# Altium PCB charge_controller_pcb.PcbDoc
Units mil, origin at the board's own origin, x right, y up, seen from the top; angles counter-clockwise.
Board outline 2000 x 2000 mil, 2 copper layers (Top Layer, Bottom Layer); 22 components, 14 nets, 55 pads, 4 vias.
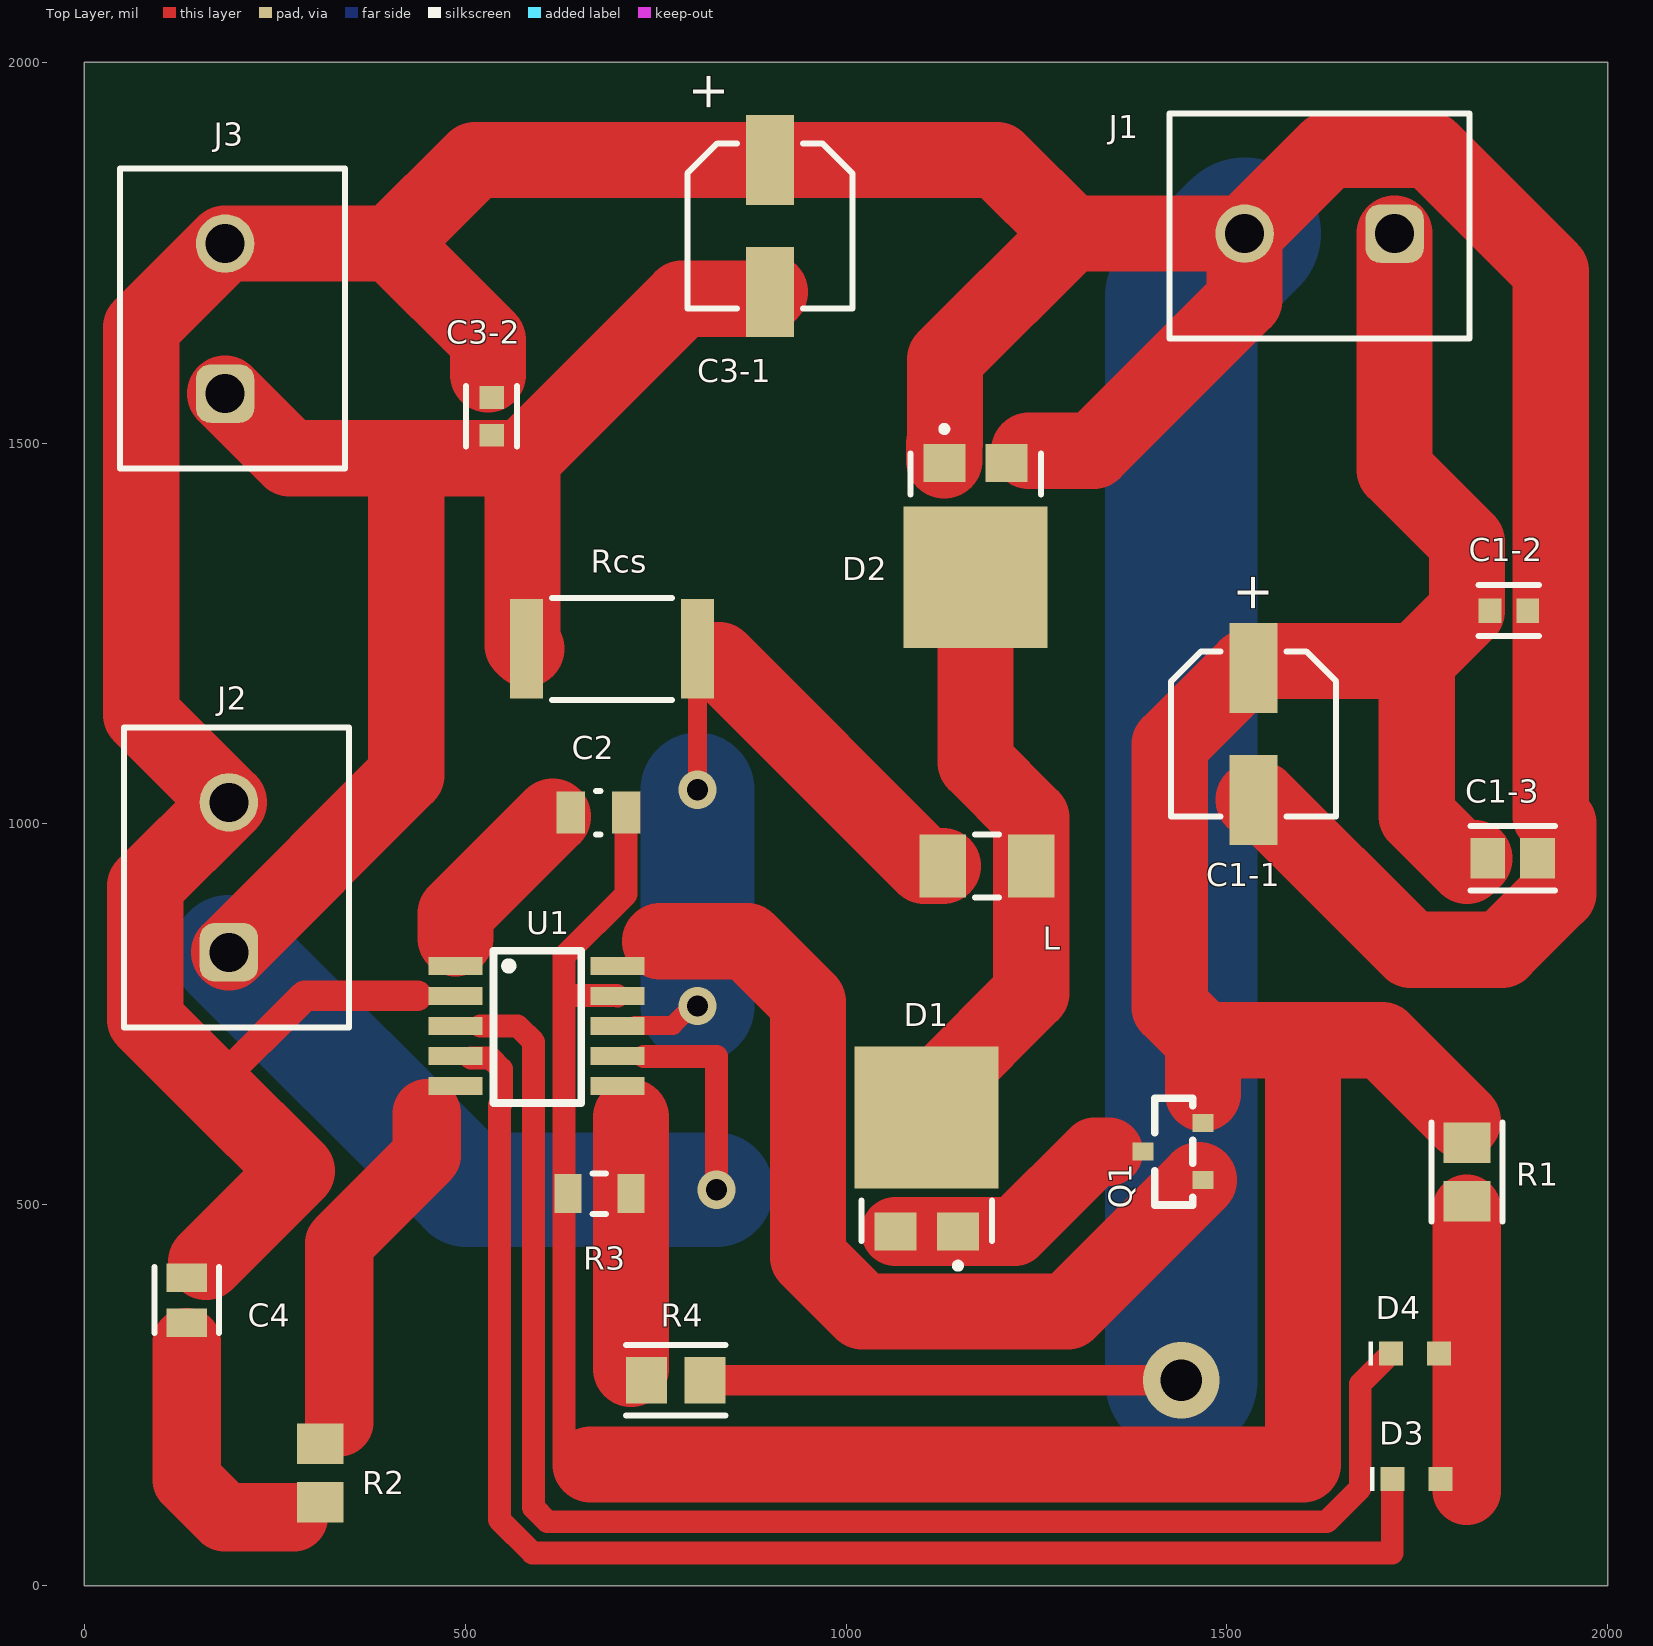
[diagram p0: Top Layer view]
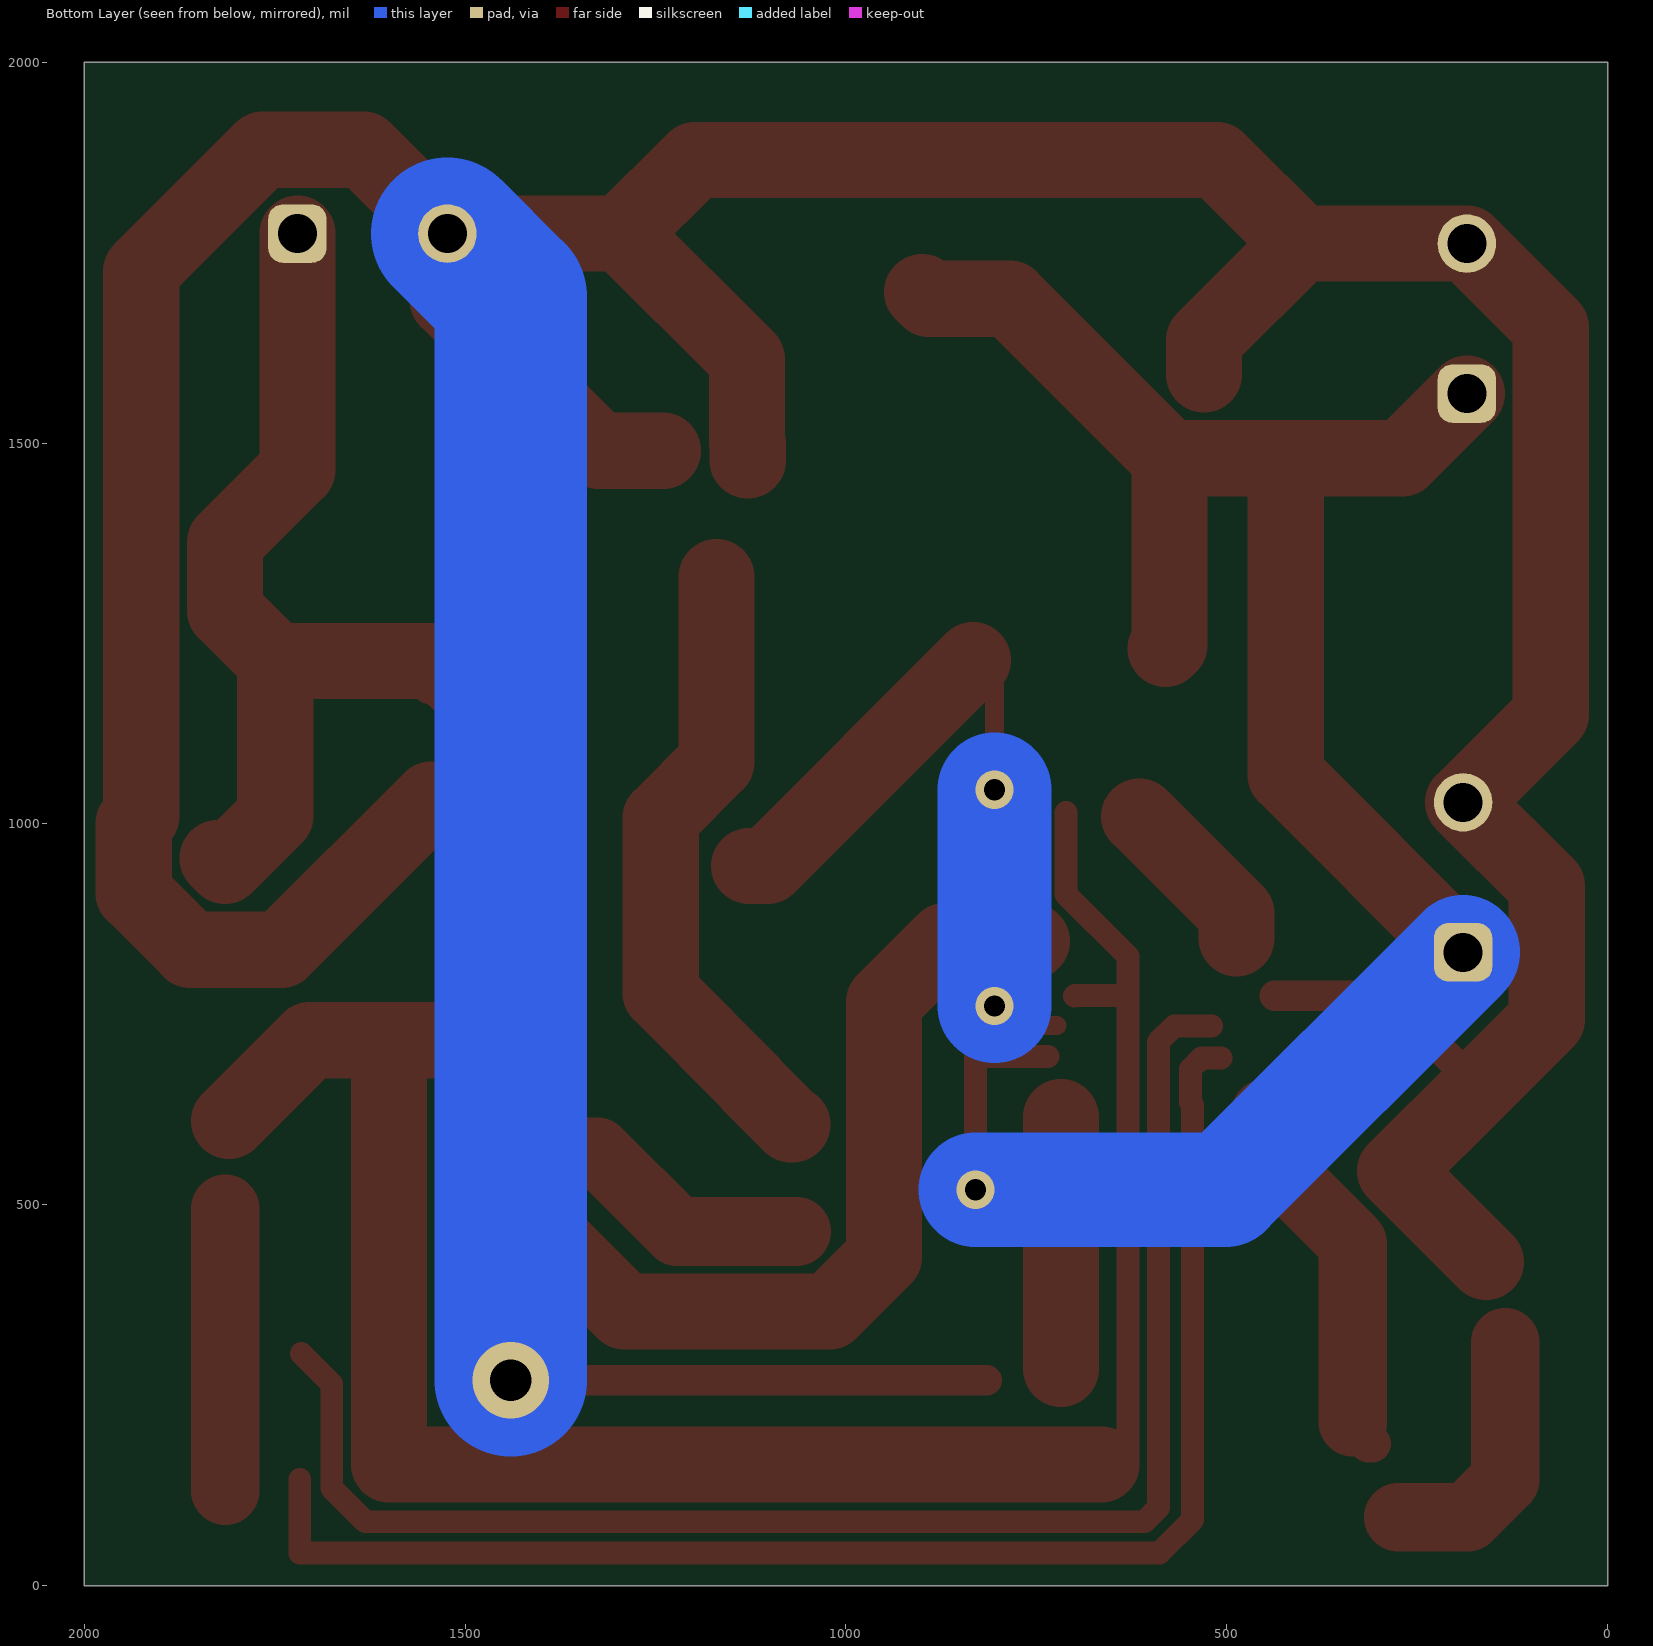
[diagram p1: Bottom Layer view, seen from below]
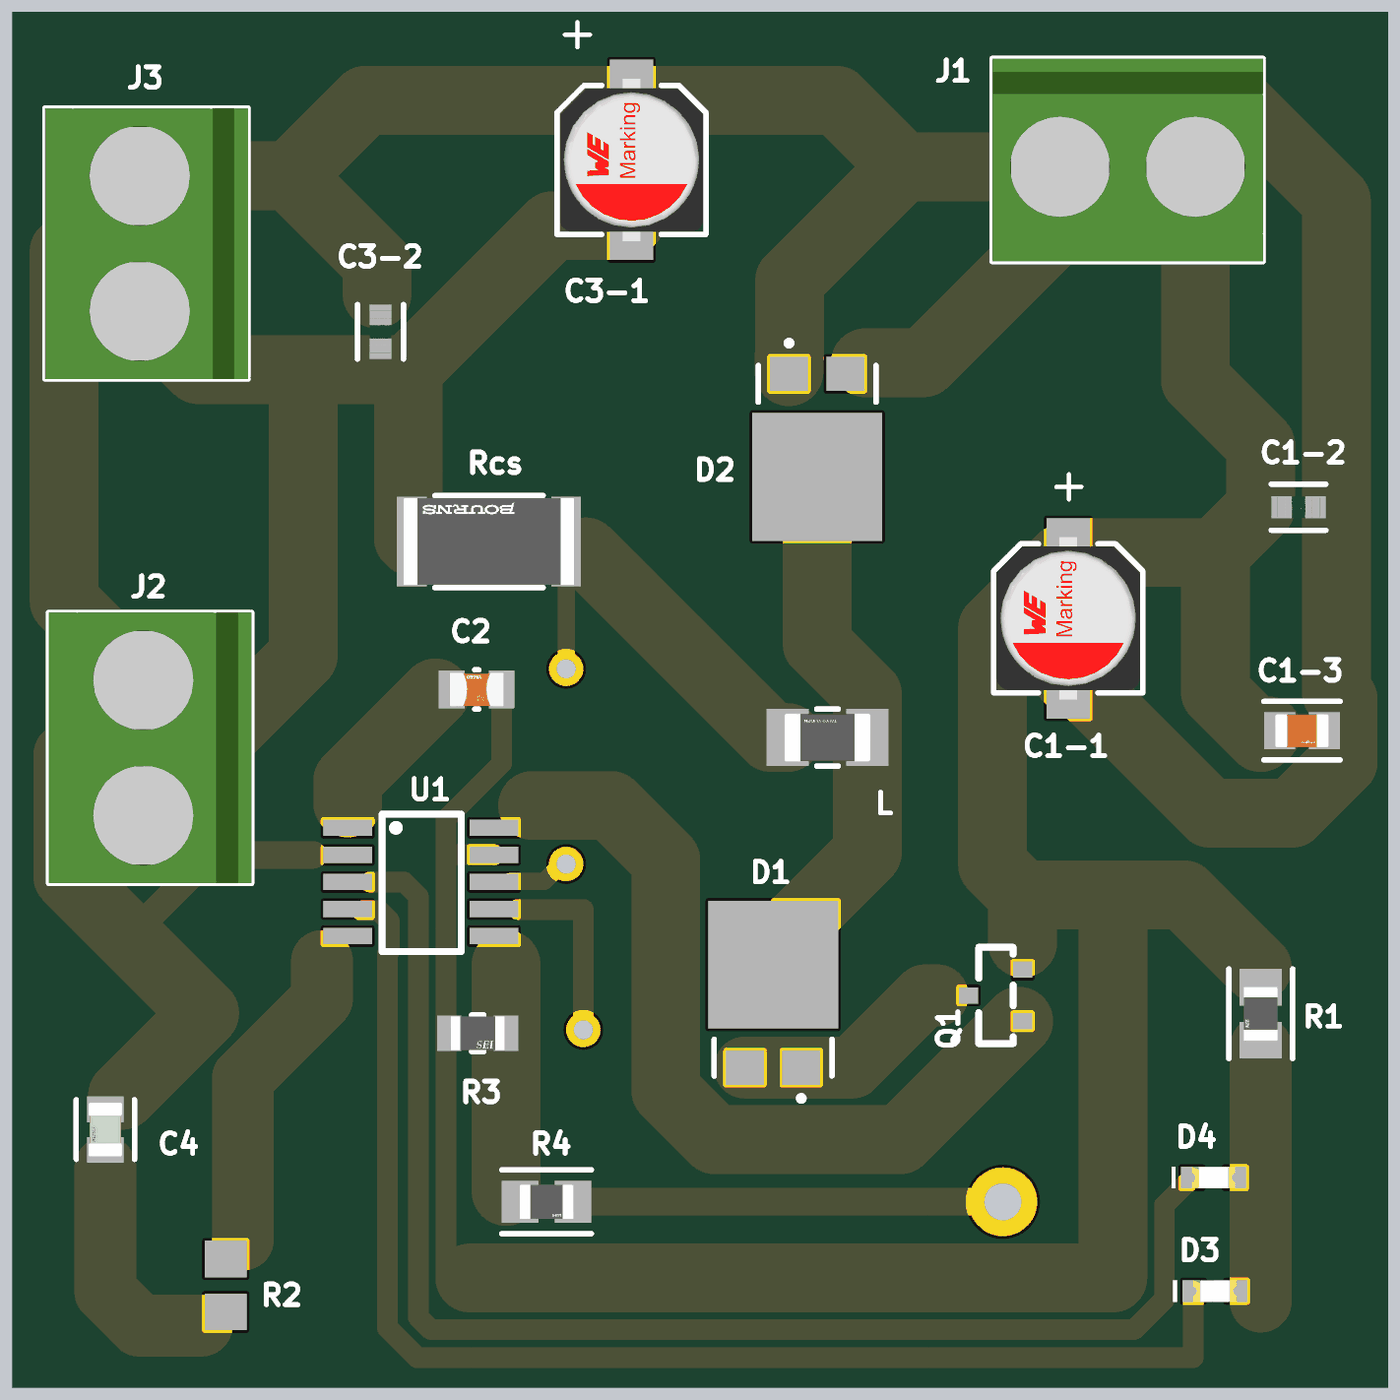
[diagram p2: 3D render of the assembled board from above, using the file's embedded part models]

## Layer stack, top to bottom
Top Solder: solder mask 0.4, Solder Resist, Dk 3.5
Top Layer: signal copper 2.7559
Dielectric 1: dielectric 12.6, FR-4, Dk 4.8
Bottom Layer: signal copper 2.7559
Bottom Solder: solder mask 0.4, Solder Resist, Dk 3.5

## Board outline
0,0 2000,0 2000,2000 0,2000

## Design rules (kind name [scope] priority, off if disabled: settings)
Clearance [All] p1: gap=10 ignorepadtopadclearanceinfootprint=FALSE
PolygonConnect [All] p1: connectstyle=Relief reliefconductorwidth=10 reliefentries=4 polygonreliefangle="90 Angle" airgapwidth=10
RoutingVias [All] p1: holewidth=28 width=50 viastyle="Through Hole" minholewidth=28 minwidth=50 maxholewidth=500 maxwidth=500
SolderMaskExpansion [All] p1: expansion=4 istentingtop=FALSE
SupplyNets "Schematic Supply Nets_9" [InNet('VG')] p1: voltage=0.000
SupplyNets "Schematic Supply Nets_8" [InNet('GND')] p2: voltage=0.000
SupplyNets "Schematic Supply Nets_7" [InNet('DRV')] p3: voltage=0.000
SupplyNets "Schematic Supply Nets_6" [InNet('CSP')] p4: voltage=0.000
SupplyNets "Schematic Supply Nets_5" [InNet('COM')] p5: voltage=0.000
SupplyNets "Schematic Supply Nets_4" [InNet('MPPT')] p6: voltage=0.000
SupplyNets "Schematic Supply Nets_3" [InNet('BAT')] p7: voltage=0.000
SupplyNets "Schematic Supply Nets_2" [InNet('CHRG')] p8: voltage=0.000
SupplyNets "Schematic Supply Nets_1" [InNet('DONE')] p9: voltage=0.000
SupplyNets "Schematic Supply Nets" [InNet('VCC')] p10: voltage=0.000
Width [All] p1: maxlimit=200 minlimit=10 preferedwidth=10
30 further rules are at their usual default settings.

## Components (designator, comment, footprint, x,y, rotation, side; value= is the part's Value field where it differs from the comment)
C1-1 "10 uF" WCAP-AS5H_D5H5.5 1535,1118.39 r90 top
C1-2 "4.7 uF" FP-CL10-IPC_C 1870,1280 r0 top
C1-3 "470 nF" FP-GRM21B-0_1-IPC_B 1875,955 r0 top
C2 "100 nF" FP-CC0805-0_85-MFG 675,1015 r180 top
C3-1 "10 uF" WCAP-AS5H_D5H5.5 900,1785 r90 top
C3-2 "4.7 uF" FP-CL10-IPC_C 535,1535 r90 top
C4 "220 nF" FP-C0805C-DN-MFG 135,375 r90 top value="0.22 μF"
D1 "SS8P3L-M3/86A" VISH-SS8P3L-TO-277A-3_V 1105.94,573.86 r0 top
D2 "SS8P3L-M3/86A" VISH-SS8P3L-TO-277A-3_V 1170,1365 r180 top
D3 "150060VS75000" WL-SMCW_0603_150060xx75000 1748.5,140 r0 top
D4 "150060RS75000" WL-SMCW_0603_150060xx75000 1746.5,305 r0 top
J1 "691137710002" 691137710002 1621.57,1784.84 r180 top
J2 "691137710002" 691137710002 200,930 r90 top
J3 "691137710002" 691137710002 194.84,1663.43 r90 top
L "47 uH" FP-LB3218-1_8-0_2-IPC_A 1185,945 r180 top
Q1 "AO3407A" AO3407A 1390,570 r270 top
R1 "1k" FP-RR1220-IPC_A 1815,543.41 r270 top
R2 "120" RESC2013X50X40ML20T20 310,148.39 r90 top
R3 "13k" FP-RMCF0805-MFG 676.34,515 r0 top
R4 "1k" FP-RR1220-IPC_A 776.59,270 r0 top
Rcs "CR2512-J/-000ELF" FP-CR2512-IPC_C 692.76,1230 r180 top
U1 "C81968" CN3767 487.4,813.74 r0 top

## Footprints (in the part's own frame and the unit in brackets; to place one, negate y for a bottom-side part, rotate by r counter-clockwise, add the part's x,y. Pads: shape width x height; smd on the part's side, far side on the other; paste and mask are expansions set on the pad)
691137710002 [mm] "Horizontal Cable Entry with Pressure Clamp, pitch 5mm, 02p"
  rrect50% 1.95x1.95 hole 1.3: 1(-2.5,0.25)
  round 1.95 hole 1.3: 2(2.5,0.25)
  silkscreen extent -5,-3.75 5,3.75, body extent -5,-3.75 5,3.75, height 11.6
AO3407A [mm]
  rect 0.6x0.7 smd: D(0,0) G(0.95,2) S(-0.95,2)
  silkscreen extent -1.78,0.38 1.78,1.65
CN3767 [mm]
  rect 1.8x0.6 smd: 1(0,0) 2(0,-1) 3(0,-2) 4(0,-3) 5(0,-4) 6(5.4,-4) 7(5.4,-3) 8(5.4,-2) 9(5.4,-1) 10(5.4,0)
  silkscreen extent 1.27,-4.57 4.19,0.51
FP-C0805C-DN-MFG [mm]
  rect 0.95x1.35 smd paste+0 mask+0: 1(-0.75,0) 2(0.75,0)
  silkscreen extent -1.1,-1.07 1.1,1.07, body extent -1.4,-0.85 1.4,0.85, height 0.25
FP-CC0805-0_85-MFG [mm]
  rect 0.95x1.4 smd paste+0 mask+0: 1(-0.925,0) 2(0.925,0)
  silkscreen extent -0.08,-0.72 0.08,0.72, body extent -1.6,-1.05 1.6,1.05, height 0.25
FP-CL10-IPC_C [mil]
  rect 29.85x31.97 smd paste+0 mask+0: 1(-24.68,0) 2(24.68,0)
  silkscreen extent -40,-33 40,33, body extent -44,-22 44,22, height 10
FP-CR2512-IPC_C [mil]
  rect 43.49x130.17 smd paste+0 mask+0: 1(-112.24,0) 2(112.24,0)
  silkscreen extent -79,-67 79,67, body extent -138,-71 138,71, height 10
FP-GRM21B-0_1-IPC_B [mil]
  rect 45.58x53.63 smd paste+0 mask+0: 1(-32.57,0) 2(32.57,0)
  silkscreen extent -55,-43 55,43, body extent -65,-37 65,37, height 10
FP-LB3218-1_8-0_2-IPC_A [mil]
  rect 61.22x82.92 smd paste+0 mask+0: 1(-58.1,0) 2(58.1,0)
  silkscreen extent -16,-41 16,41, body extent -108,-61 108,61, height 10
FP-RMCF0805-MFG [mm]
  rect 0.9x1.3 smd paste+0 mask+0: 1(-1.05,0) 2(1.05,0)
  silkscreen extent -0.23,-0.67 0.23,0.67, body extent -1.6,-0.77 1.6,0.77, height 0.25
FP-RR1220-IPC_A [mil]
  rect 53.34x61.27 smd paste+0 mask+0: 1(-38.41,0) 2(38.41,0)
  silkscreen extent -65,-46 65,46, body extent -85,-50 85,50, height 10
RESC2013X50X40ML20T20 [mm] "Chip Resistor, 2-Leads, Body 2.00x1.25mm, IPC Low Density"
  rect 1.35x1.55 smd: 1(-0.975,0) 2(0.975,0)
  body extent -1.1,-0.72 1.1,0.72, height 0.5
VISH-SS8P3L-TO-277A-3_V [mm] "TO-277A, 3-Leads, Body 4.3x6.1mm"
  rect 1.4x1.27 smd: 1(1.04,-2.765) 2(-1.04,-2.765)
  rect 4.8x4.72 smd: 3(0,1.04)
  silkscreen extent -2.17,-3.97 2.17,-1.72, body extent -2.15,-3.05 2.15,3.05, height 1.2
WCAP-AS5H_D5H5.5 [mm] "Aluminum Electrolytic Capacitors, 5x5.5mm"
  rect 3x1.6 smd: 1(2.2,0) 2(-2.2,0)
  silkscreen extent -2.75,-2.75 2.75,2.75, body extent -3,-2.65 3,2.65, height 5.5
WL-SMCW_0603_150060xx75000 [mm] "SMD Mono-color Chip LED, body 1.60 x 0.80 mm"
  rect 0.8x0.8 smd: 1(-0.8,0) 2(0.8,0)
  silkscreen extent -1.55,-0.4 -1.4,0.4, body extent -0.8,-0.4 0.8,0.4, height 0.7

## Part data
C1-1 C3-1: library part CMP-03913-53914689-1, "865230542002 WCAP-AS5H Aluminum Electrolytic Capacitors", Capacitance=10µF, Case/Package=Radial, Insulation Resistance=10MΩ, Leakage Current=3.5µA, Max Operating Temperature=105°C, Min Operating Temperature=-40°C, Ripple Current=25mA, Tolerance=20%, Voltage Rating=35V, Diameter=5mm, Height=5.5mm, Height - Seated (Max)=5.5118mm, Length=5.5mm, Life (Hours)=5000hours, Mount="Surface Mount", NexarPartId=53914689, Packaging="Tape & Reel (TR)", Polarity=Polar, REACH SVHC=Unknown, Ripple Current (AC)=25mA, RoHS=Compliant, Voltage Rating (DC)=35V, Width=5.3mm
C1-2 C3-2: library part CMP-13271-003017-1, "Cap Ceramic 4.7uF 10V X5R ±10% Pad SMD 0603 +85°C T/R", Capacitance=4.7uF, Case Code (Imperial)=0603, Case Code (Metric)=1608, Dielectric=X5R, Max Operating Temperature=85°C, Min Operating Temperature=-55°C, Package Quantity=1, Tolerance=10%, Voltage Rating=10V, Case/Package=0603, Contact Plating=Tin, Depth=0.8mm, Height=0.8mm, Length=1.6mm, Mount="Surface Mount", Packaging="Tape and Reel", Radiation Hardening=No, Thickness=0.035inch, Width=0.031inch
C1-3: library part CMP-06035-060025-1, "Chip Multilayer Ceramic Capacitors for General Purpose, 0805, 0.47uF, X7R, 15%, 10%, 50V", Capacitance=470nF, Case Code (Imperial)=0805, Case Code (Metric)=2012, Dielectric=X7R, Max Operating Temperature=125°C, Min Operating Temperature=-55°C, Package Quantity=1, Tolerance=10%, Voltage=50V, Case/Package=0805, Construction=Flat, Depth=1.25mm, Height=1.25mm, Lead Free="Lead Free", Length=2mm, Material=Ceramic, Mount="Surface Mount", Packaging="Tape and Reel", REACH SVHC="No SVHC", Series=GRM, Size=1.25mm, Termination=SMD/SMT, Thickness=0.053inch, Voltage Rating=50V, Voltage Rating (DC)=50V, Width=0.049inch
C2: library part CMP-2100-03606-3, "CAP CER 0.1UF 50V X7R 0805", Manufacturer=Yageo, Manufacturer Part Number=CC0805KRX7R9BB104, Package=CC0805-0.85, Temperature="-30°C to +85°C", Temperature Characteristic=X7R, Temperature Range High=+85°C, Temperature Range Low=-30°C, Tolerance=0.1, Voltage Rating="50 V", Automotive=No, Capacitance="100 nF", Category=Cap, ComponentLink2Description=Datasheet, ComponentLink2URL=http://www.yageo.com/documents/recent/UPY-GPHC_Y5V_6.3V-to-50V_8.pdf, Device Class L1="Passive Components", Device Class L2=Capacitors, Device Class L3="Ceramic Capacitors", Digikey Description="CAP CER 0.1UF 50V X7R 0805", Footprint Url=http://www.yageo.com/exep/pages/download/literatures/UPY-C_GEN_24.pdf, Height=0.95mm, Ipc Land Pattern Name=CAPC200125X85, Lead Free=Yes, Material=Ceramic, Mouser Description="Multilayer Ceramic Capacitors MLCC - SMD/SMT 100nF 50V X7R 10%", Octopart=https://octopart.com/cc0805krx7r9bb104-yageo-192993, RoHS=TRUE
C4: library part CMP-1036-04552-2, "CAP CER 0.22UF 50V X7R 0805", Capacitance="0.22 μF", Manufacturer=KEMET, Manufacturer Part Number=C0805C224K5RACTU, Package=C0805C-DN, Temperature="-55°C to +125°C", Temperature Characteristic=X7R, Temperature Coefficient=30ppm/°C, Temperature Range High=+125°C, Temperature Range Low=-55°C, Tolerance=0.1, Voltage Rating="50 V", Automotive=No, Category=Cap, ComponentLink2Description=Datasheet, ComponentLink2URL=https://content.kemet.com/datasheets/KEM_C1003_C0G_SMD.pdf, Device Class L1="Passive Components", Device Class L2=Capacitors, Device Class L3="Ceramic Capacitors", Digikey Description="CAP CER 0.22UF 50V X7R 0805", Height=0.88mm, Ipc Land Pattern Name=CAPC200125X78, Lead Free=Yes, Material=Ceramic, Mouser Description="CAP CER 0.22UF 50V X7R 0805", Octopart=https://octopart.com/c0805c224k5ractu-kemet-144670, RoHS=TRUE
D1 D2: library part CMP-0545-00001-2, "High Current Density Surface Mount Schottky Barrier Rectifier, 30 V, -55 to 155 degC, 3-pin TO-277A, Pb-Free, Tape and Reel", Manufacturer="Vishay Semiconductor", Operating Junction and Storage Temperature Range="-55 to 150 degC", Typical Junction Capacitance="330 pF", ComponentLink1Description="Manufacturer URL", ComponentLink1URL=http://www.vishay.com/, ComponentLink2Description=Datasheet, ComponentLink2URL=http://www.vishay.com/docs/89001/ss8p3l.pdf, ComponentLink3Description="Package Specification", ComponentLink3URL=http://www.vishay.com/docs/89001/ss8p3l.pdf, DatasheetVersion=28/06/2012, EAS="20 mJ", IF(AV)="8.0 A", IFSM="150 A", Mounting Technology="Surface Mount", PackageDescription="3-Pin TO-277A (SMPC), Body 4.3 x 6.1 mm", PackageReference=TO-277A-3, Packing="Tape and Reel", PartNumber=SS8P3L-M3/86A, RoHS=TRUE, VF at IF="8.0 A=0.472 V", VRRM="30 V"
D3: library part CMP-1426-00006-7, "WURTH ELEKTRONIK - 150060VS75000 - LED, Green, SMD, 0603, 30 mA, 2 V, 570 nm", Case Code (Imperial)=0603, Case Code (Metric)=1608, Color=Green, Forward Current=100mA, Forward Voltage=2V, Max Junction Temperature (Tj)=95°C, Max Operating Temperature=85°C, Max Reverse Voltage (DC)=5V, Min Operating Temperature=-40°C, Power Dissipation=72mW, Test Current=20mA, Case/Package=0603, Dominant Wavelength=570nm, Height=700µm, Length=1.6mm, Lens Style="Clear, Rectangular", Luminous Intensity=40mcd, Mount="Surface Mount", Number of Pins=2, Packaging="Tape and Reel", Peak Wavelength=572nm, REACH SVHC=Unknown, Reverse Voltage=5V, RoHS=Compliant, Viewing Angle=140°, Wavelength=570nm, Width=800µm
D4: library part CMP-1426-00001-4, "LED Low-Power Uni-Color Red 630nm 2V 2-Pin Chip 0603(1608Metric) T/R", Case Code (Imperial)=0603, Case Code (Metric)=1608, Color=Red, Forward Current=100mA, Forward Voltage=2V, Max Junction Temperature (Tj)=95°C, Max Operating Temperature=85°C, Max Reverse Voltage (DC)=5V, Min Operating Temperature=-40°C, Power Dissipation=72mW, Test Current=20mA, Case/Package=0603, Dominant Wavelength=625nm, Height=700µm, Length=1.6mm, Lens Style="Clear, Rectangular", Luminous Intensity=250mcd, Mount="Surface Mount", Packaging="Tape and Reel", Peak Wavelength=630nm, REACH SVHC=Unknown, Reverse Voltage=5V, RoHS=Compliant, Viewing Angle=140°, Wavelength=625nm, Width=800µm
J1 J2 J3: library part CMP-1502-03324-2, Current Rating=16A, Max Operating Temperature=120°C, Min Operating Temperature=-30°C, Voltage Rating=300V, Contact Material="Nickel, Tin", Height=11.6mm, Lead Pitch=5mm, NexarPartId=78871135, Number of Contacts=2, Number of Pins=2, Number of Rows=1, Packaging=Box, RoHS=Non-Compliant
L: library part CMP-14484-000479-1, "SMD Inductors 47uH ±10% 0.205A 1.196Ω 1207", Case Code (Imperial)=1207, Case Code (Metric)=3218, Current Rating=205mA, DC Resistance (DCR)=920mR, Inductance=47uH, Max Operating Temperature=105°C, Min Operating Temperature=-40°C, Package Quantity=2000, Resistor Type=Wirewound, Self Resonant Frequency=12MHz, Test Frequency=2.52MHz, Tolerance=10%, Case/Package=1207, Core Material=Ferrite, DC Current=205mA, Depth=2mm, Halogen Free="Halogen Free", Height=1.8mm, Height - Seated (Max)=0.08inch, Lead Free="Lead Free", Lead Pitch=1.7mm, Length=3.2mm, Max DC Current=205mA, Military Standard=Not, Mount="Surface Mount", Number of Pins=2, Packaging="Tape and Reel", Radiation Hardening=No, RoHS Compliant=Yes, Series=LB, Shielding=Unshielded, Termination=SMD/SMT, Width=1.8mm
R1 R4: library part CMP-2001-03210-2, "1kΩ ±0.5% 0.1W 1/10W Chip Resistor 0805 (2012 Metric) Thin Film", Case Code (Imperial)=0805, Case Code (Metric)=2012, Max Operating Temperature=125°C, Max Power Dissipation=100mW, Min Operating Temperature=-55°C, Package Quantity=1, Resistance=1kR, Resistance Tolerance=0.5%, Resistor Type="Thin Film", Temperature Coefficient=25ppm/°C, Voltage Rating=100V, Case/Package=0805, Depth=1.25mm, Height=0.4mm, Lead Free="Lead Free", Length=2mm, Number of Terminations=2, Packaging="Tape and Reel", Power Rating=100mW, RoHS Compliant=Yes, Series=RR, Size Code=0805, Technology="THIN FILM", Termination=SMD/SMT, Tolerance=0.5%, Voltage Rating (DC)=100V, Width=1.25mm
R2: library part CMP-2001-04810-1, Manufacturer=Susumu, Part Number=RG2012N-121-W-T1
R3: library part CMP-26527-004824-1, "13kΩ ±1% 0.125W 0805 Thick Film Chip Resistor AEC-Q200 compliant", Case Code (Imperial)=0805, Case Code (Metric)=2012, Max Operating Temperature=155°C, Max Power Dissipation=125mW, Min Operating Temperature=-55°C, Resistance=13kR, Resistor Type="Thick Film", Temperature Coefficient=100ppm/°C, Tolerance=1%, Case/Package=0805, Construction=Rectangular, Contact Plating=Tin, Depth=1.25mm, Features="Automotive AEC-Q200", Height=0.026inch, Length=2mm, Military Standard=Not, Mount="Surface Mount", Number of Terminations=2, Packaging="Tape and Reel", Radiation Hardening=No, RoHS Compliant=Yes, Series=RMCF, Width=0.049inch
Rcs: library part CMP-07231-001301-1, "Thick Film Chip Resistors 2512 0Ω 1W 5%", Case Code (Imperial)=2512, Case Code (Metric)=6332, Max Operating Temperature=155°C, Max Power Dissipation=1W, Min Operating Temperature=-55°C, Resistance=0mR, Temperature Coefficient=500ppm/°C, Tolerance=5%, Voltage Rating=200V, Case/Package=2512, Composition="Thick Film", Contact Plating=Tin, Depth=3.1mm, Length=6.3mm, Military Standard=Not, Mount="Surface Mount", Packaging="Tape and Reel", Power Rating=1W, Radiation Hardening=No, REACH SVHC="No SVHC", Termination=SMD/SMT, Voltage Rating (DC)=200V
U1: library part CN3767

## Via types
v1: diameter 50, hole 28, Top Layer to Bottom Layer, 3 vias
v2: diameter 100, hole 54, Top Layer to Bottom Layer, 1 vias

## Nets (pads, with @x,y where several pads share a name; then routed paths per layer and width w, separated by ;. In a path a pad name is that pad's centre, name@x,y a point inside that pad or via, vN(x,y) a via of type N, cw(c..) or ccw(c..) an arc to the next point about the centre after c; other vN are vias at no path point)
BAT: C3-1.2 C3-2.1 J2.1 J3.1 Rcs.2 U1.7 | length 2876.4
  Top Layer w30: U1.7@735,695 830,695 v1(830,520)
  Top Layer w100: J3.1 270,1480 422.78,1480 ; J2.1 422.78,1064.2 422.78,1275 422.78,1480 ; Rcs.2 575.56,1234.97 575.56,1480 ; C3-1.2 890.94,1689.33 784.89,1689.33 575.56,1480 ; 422.78,1480 575.56,1480
  Bottom Layer w150: J2.1 501.73,520 v1(830,520)
CHRG: D4.1 U1.3 | length 1994.3
  Top Layer w30: U1.3@520,735 569.04,735 590,714.04 590,102.57 608.29,84.28 1631.07,84.28 1675,128.21 1675,265 D4.1
COM: R2.2 U1.5 | length 456.6
  Top Layer w50: R2.2 R2.2@313.94,186.77
  Top Layer w90: 335,215 335,450 450,565 450,620
CSP: L.2 Rcs.1 U1.8 | length 966.9
  Top Layer w25: U1.8@722.93,735.69 772.74,735.69 798.24,761.18 v1(805,761.18) ; v1(805,1045) Rcs.1
  Top Layer w100: 833.26,1214.92 1103.17,945 L.2
  Bottom Layer w150: v1(805,761.18) v1(805,1045)
DONE: D3.1 U1.4 | length 1925.6
  Top Layer w30: U1.4@507.83,693.07 533.19,693.07 547.83,678.43 547.83,634.09 545,631.26 545,86.76 588.43,43.33 1717.01,43.33 D3.1
DRV: Q1.G U1.10 | length 1175.7
  Top Layer w100: 756.17,846.18 870.24,846.18 950,766.42 950,431.7 1021.51,360.2 1290.64,360.2 Q1.G@1463.04,532.6
GND: C1-1.2 C1-2.2 C1-3.2 C3-1.1 C3-2.2 C4.2 D2.1 D2.2 J1.2 J2.2 J3.2 R4.2 U1.2 | length 8402.3
  Top Layer w40: 169.37,654.37 289.37,774.37 437.1,774.37 ; R4.2 v2(1440,270)
  Top Layer w100: 160,425 279.37,544.37 169.37,654.37 80.16,743.58 80.16,918.43 J2.2 75,1143.58 75,1651.85 J3.2 403.15,1761.85 ; 530,1590 530,1635 403.15,1761.85 ; D2.1@1129.06,1476.97 1129.06,1499.06 1130,1500 1130,1610 1295,1775 ; 1240,1490 1325,1490 1523.15,1688.15 J1.2 ; C1-1.2 1544.45,1031.77 1741.22,835 1860.56,835 1934.78,909.21 1934.78,1000.56 1925,1010.34 1925,1725.56 1765.56,1885 1633.15,1885 J1.2 ; 403.15,1761.85 512.91,1871.61 C3-1.1 1198.39,1871.61 1295,1775 ; 1295,1775 J1.2
  Bottom Layer w200: v2(1440,270) 1440,1691.85 J1.2
MPPT: R3.2 R4.1 U1.6 | length 330
  Top Layer w100: R4.1@717.68,285 R3.2 717.68,615
NetC4_1: C4.1 R2.1 | length 341.1
  Top Layer w90: 135,320 135,139.29 184.29,90 275,90
NetD1_1: D1.1 D1.2 Q1.D | length 323.4
  Top Layer w90: D1.2@1065,465.2 1221.52,465.2 1326.33,570 1345,570
NetD1_3: D1.3 D2.3 L.1 | length 821.4
  Top Layer w100: D1.3@1070.41,605.41 1071.99,605.41 1124.49,657.91 1124.49,659.49 1243.1,778.1 1243.1,1008.05 1170,1081.14 D2.3
NetD3_2: D3.2 D4.2 R1.2 | length 370
  Top Layer w90: 1815,125 R1.2@1815,495
VCC: C1-1.1 C1-2.1 C1-3.1 C2.1 J1.1 Q1.S R1.1 R3.1 U1.9 | length 4618.8
  Top Layer w30: 630,160 630,775 ; U1.9 699.37,775 630,775 ; C2.1 711.42,907.76 630,826.34 630,775
  Top Layer w100: 665,159.28 845,159.28 935,159.28 1305,159.28 1600,159.28 1600,716.26 ; 1468.74,646.26 1468.74,716.26 1425,760 1425,1104.45 1525.55,1205 C1-1.1 1544.06,1214.06 1749.06,1214.06 ; 1470,716.26 1600,716.26 ; J1.1 1720,1465 1815,1370 1815,1280 1749.06,1214.06 ; 1810,610 1703.74,716.26 1600,716.26 ; C1-3.1@1824.78,955 1824.78,954.78 1815,945 1749.06,1010.94 1749.06,1214.06
VG: C2.2 U1.1 | length 212.9
  Top Layer w100: 487.4,850 487.4,882.4 615,1010

## Silkscreen, mask and mechanical layers (free items; w line width, h text height)
Mechanical 1:
  the board outline again, w10

## Text inside footprints (layer, text, board x,y; h text height)
C1-1: Top Overlay "+" at 1554.68,1275.87 h48 r90
C3-1: Top Overlay "+" at 840,1933.39 h48 r90